# Altium PCB PressureSensor_Michał.Kapuściński.PcbDoc
Units mm, origin at the board's own origin, x right, y up, seen from the top; angles counter-clockwise.
Board outline 83.35 x 9.7 mm, 2 copper layers (Top Layer, Bottom Layer); 21 components, 19 nets, 106 pads, 37 vias.
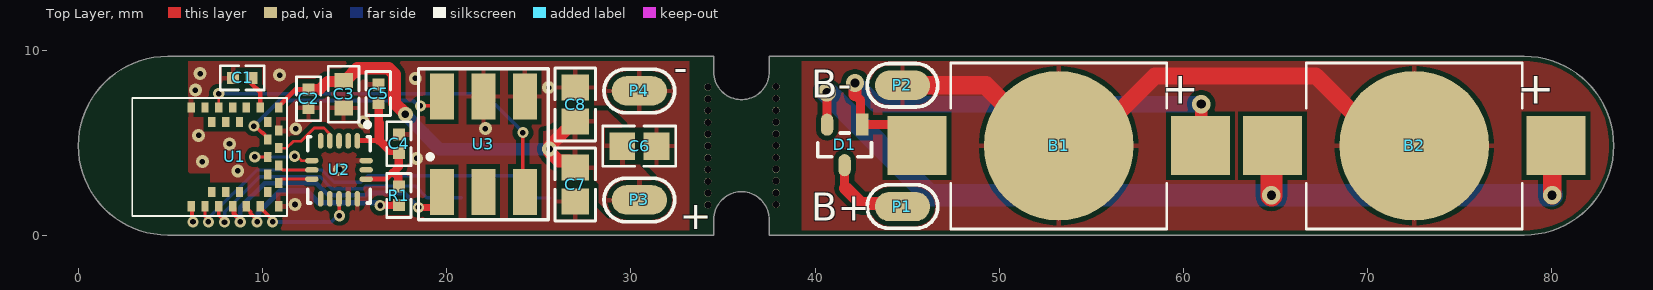
[diagram p0: Top Layer view]
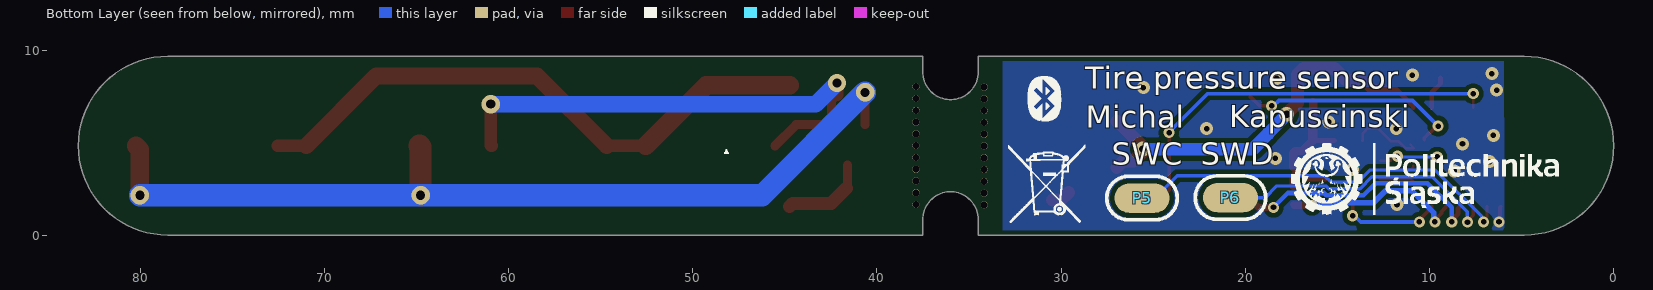
[diagram p1: Bottom Layer view, seen from below]
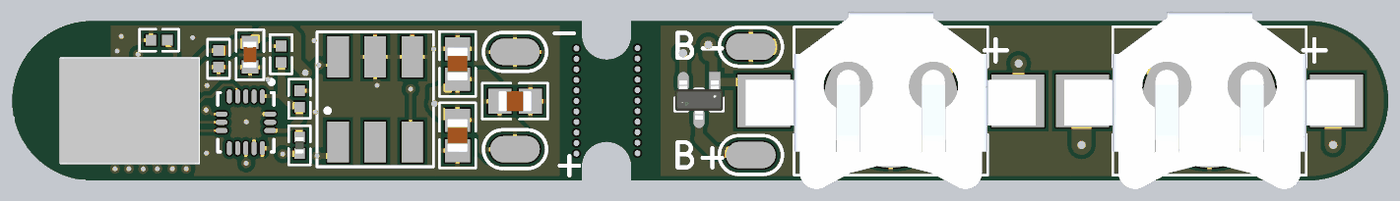
[diagram p2: 3D render of the assembled board from above, using the file's embedded part models]

## Layer stack, top to bottom
Top Solder: solder mask 0.0102, Solder Resist, Dk 3.5
Top Layer: signal copper 0.0356
Dielectric 1: dielectric 0.32, FR-4, Dk 4.8
Bottom Layer: signal copper 0.0356
Bottom Solder: solder mask 0.0102, Solder Resist, Dk 3.5

## Board outline
4.85,0 cw(c4.85,4.85) 4.85,9.7 34.5,9.7 34.5,8.85 ccw(c36,8.85) 37.5,8.85 37.5,9.7 78.5,9.7 cw(c78.5,4.85) 78.5,0 37.5,0 37.5,0.85 ccw(c36,0.85) 34.5,0.85 34.5,0

## Design rules (kind name [scope] priority, off if disabled: settings)
BoardOutlineClearance [All] p1: gap=0.254 ignorepadtopadclearanceinfootprint=FALSE except(0: Arc-SplitContinuation Track-SplitContinuation SMDPad-SplitContinuation THPad-SplitContinuation Via-SplitContinuation Fill-SplitContinuation Poly-SplitContinuation Region-SplitContinuation Text-SplitContinuation)
Clearance [All] p1: gap=0.254 ignorepadtopadclearanceinfootprint=FALSE except(0: THPad-Hole Via-Hole Fill-Hole Poly-Hole Region-Hole Text-Hole; 0.127: Arc-Arc Arc-Track Track-Track SMDPad-SMDPad; 0.203: Arc-SMDPad Arc-THPad Track-SMDPad Track-THPad Via-Via; 0.33: Arc-Hole Track-Hole SMDPad-Hole)
HoleSize [All] p1: absolutevalues=TRUE maxlimit=2.54 minlimit=0.3 maxpercent=80.000 minpercent=20.000
HoleToHoleClearance [All] p1: gap=0.5 allowstackedmicrovias=TRUE
MinimumSolderMaskSliver [All] p1: minsoldermaskwidth=0.145
PolygonConnect [All] p1: thpad.connectstyle=Relief thpad.reliefconductorwidth=0.5 thpad.reliefentries=4 thpad.polygonreliefangle="45 Angle" thpad.airgapwidth=0.254 smdpad.connectstyle=Relief smdpad.reliefconductorwidth=0.254 smdpad.reliefentries=4 smdpad.polygonreliefangle="90 Angle" smdpad.airgapwidth=0.254 via.connectstyle=Direct via.reliefconductorwidth=0.254 via.reliefentries=4 via.polygonreliefangle="90 Angle" via.airgapwidth=0.254
RoomDefinition Sheet1 [InComponentClass('Sheet1')] p1: confinementstyle=ConfineIn formatcopy=TRUE lockcomponents=FALSE outline 0,-1 0,10.7 85,10.7 85,-1
RoutingVias [All] p1: holewidth=0.3 width=0.6 viastyle="Through Hole" minholewidth=0.3 minwidth=0.6 maxholewidth=0.711 maxwidth=1.27
SilkToSolderMaskClearance [IsPad] p1: minsilkscreentomaskgap=0.15 clearancetoexposedcopper=TRUE
SolderMaskExpansion SolderMaskExpansion_Via [IsVia] p1: expansion=0.102 istentingtop=TRUE
SolderMaskExpansion [All] p2: expansion=0.102 istentingtop=FALSE
UnRoutedNet [All] p1: checkbadconnections=TRUE
Width [All] p1: maxlimit=3 minlimit=0.127 preferedwidth=0.254
25 further rules are at their usual default settings.

## Components (designator, comment, footprint, x,y, rotation, side; value= is the part's Value field where it differs from the comment)
B1 "BK-870" BK-870_footprint 53.222,4.85 r180 top locked
B2 "BK-870" BK-870_footprint 72.526,4.85 r180 top locked
C1 "1uF" "!!!! MOJ capacitor !!!!-Footprint-1" 8.898,8.534 r0 top locked
C2 "100nF" "!!!! MOJ capacitor !!!!-Footprint-1" 12.497,7.399 r90 top locked
C3 "4.7uF" "New footprint 1" 14.402,7.645 r90 top locked
C4 "100nF" "!!!! MOJ capacitor !!!!-Footprint-1" 17.399,4.961 r270 top locked
C5 "100nF" "!!!! MOJ capacitor !!!!-Footprint-1" 16.281,7.679 r270 top locked
C6 "10uF 10V" "!!! moj cap 0805 IPC_A" 30.455,4.826 r180 top locked
C7 "10uF 10V" "!!! moj cap 0805 IPC_A" 26.975,2.743 r90 top locked
C8 "10V 10uF" "!!! moj cap 0805 IPC_A" 26.975,7.087 r270 top locked
D1 "BAT54C" FP-MA03D-IPC_B 41.6,4.894 r270 top locked value=10pF
P1 "BAT+" "SMD wire pad-Footprint-1" 44.74,1.549 r0 top locked
P2 "BAT-" "SMD wire pad-Footprint-1" 44.74,8.128 r0 top locked
P3 "BAT+" "SMD wire pad-Footprint-1" 30.455,1.905 r0 top locked
P4 "BAT-" "SMD wire pad-Footprint-1" 30.455,7.823 r0 top locked
P5 "SWC" "SMD wire pad-Footprint-1" 25.603,2.007 r180 bottom
P6 "SWD" "SMD wire pad-Footprint-1" 20.803,2.032 r180 bottom
R1 "100R" "!!!! Moj Resistor !!!!-Footprint-2" 17.399,2.142 r90 top locked
U1 "MDBT42V" MDBT42V 2.921,4.242 r90 top locked
U2 "ADXL362" ADI-CC-16-4_N 14.15,3.539 r270 top
U3 "MD-PS002" MD-PS002-Footprint-1 19.736,2.343 r0 top locked

## Footprints (in the part's own frame and the unit in brackets; to place one, negate y for a bottom-side part, rotate by r counter-clockwise, add the part's x,y. Pads: shape width x height; smd on the part's side, far side on the other; paste and mask are expansions set on the pad)
"!!! moj cap 0805 IPC_A" [mm]
  rect 1.406x1.508 smd: 1(-0.926,0) 2(0.926,0)
  silkscreen extent -1.98,-1.09 1.98,1.09, body extent -1,-0.63 1,0.63, height 0.94
"!!!! MOJ capacitor !!!!-Footprint-1" [mm]
  rect 0.65x0.65 smd: 1(-0.5,0) 2(0.5,0)
  silkscreen extent -1.19,-0.66 1.19,0.66, body extent -0.53,-0.27 0.53,0.28, height 0.4
"!!!! Moj Resistor !!!!-Footprint-2" [mm]
  rect 0.65x0.65 smd: 1(-0.5,0) 2(0.5,0)
  silkscreen extent -1.19,-0.66 1.19,0.66, body extent -0.5,-0.25 0.5,0.25, height 0.4
ADI-CC-16-4_N [mm] "QFN, 16-Leads, Body 3.25x3mm, Pitch 0.5mm, IPC Medium Density"
  oval 0.85x0.3 smd: 1(-1.575,1) 2(-1.575,0.5) 3(-1.575,0) 4(-1.575,-0.5) 5(-1.575,-1) 9(1.575,-1) 10(1.575,-0.5) 11(1.575,0) 12(1.575,0.5) 13(1.575,1)
  oval 0.3x0.725 smd: 6(-0.5,-1.475) 7(0,-1.475) 8(0.5,-1.475) 14(0.5,1.475) 15(0,1.475) 16(-0.5,1.475)
  silkscreen extent -2.57,-1.7 1.8,1.7, body extent -1.65,-1.55 1.65,1.55, height 1.14
BK-870_footprint [mm]
  rect 3.2x3.2 smd: 1(-7.695,0) 3(7.695,0)
  round 8.13 smd: 2(0,0)
  silkscreen extent -5.86,-4.5 5.86,4.52, body extent -8.79,-5.39 8.79,5.39, height 3.18
FP-MA03D-IPC_B [mm]
  rect 1.204x0.671 smd paste+0 mask+0: 1(-1.1,0.95)
  rrect100% 1.204x0.671 smd paste+0 mask+0: 2(-1.1,-0.95) 3(1.1,0)
  silkscreen extent -0.65,-1.46 0.65,1.46, body extent -1.95,-1.71 1.95,1.71, height 0.25
MD-PS002-Footprint-1 [mm]
  rect 1.3x2.5 smd: 1(0,0) 2(2.25,0) 3(4.5,0) 4(4.5,5.175) 5(2.25,5.175) 6(0,5.175)
  silkscreen extent -1.28,-1.51 5.78,6.69
MDBT42V [mm]
  rect 0.55x0.4 smd mask+0: 1(-2.675,-3.2) 2(-2.675,-3.95) 3(-1.9,-4.325) 4(-2.675,-4.7) 5(-1.9,-5.075) 6(-2.675,-5.45) 7(-1.9,-5.825) 8(-2.675,-6.2) 9(-2.675,-6.95) 10(-2.675,-7.95) 11(-1.9,-7.365) 12(-1.425,-7.95) 13(-0.95,-7.365) 14(-0.475,-7.95) 15(0,-7.365) 16(0.475,-7.95) 17(0.95,-7.365) 18(1.425,-7.95) 19(1.9,-7.365) 20(2.675,-7.95) 21(2.675,-6.95) 22(2.675,-6.2) 23(1.9,-5.825) 24(2.675,-5.45) 25(1.9,-5.075) 26(2.675,-4.7) 27(1.9,-4.325) 28(2.675,-3.95) 29(2.675,-3.2)
  silkscreen extent -3.2,-8.4 3.2,0, body extent -3.2,-8.37 3.2,0.02, height 1.5
"New footprint 1" [mm]
  rect 0.8x1 smd: 1(-0.75,0) 2(0.75,0)
  silkscreen extent -1.52,-0.84 1.52,0.84, body extent -0.8,-0.41 0.8,0.41, height 0.9
"SMD wire pad-Footprint-1" [mm]
  oval 3x1.6 smd: 1(0,0)
  silkscreen extent -1.92,-1.18 1.92,1.18

## Part data
B1 B2: library part CMP-018-000000-3, "Battery Retainer Coin, 10.0mm 1 Cell SMD _SMT_ Tab", Package="DFN-8 MPD", Availability=Unavailable, Component Type=Standard, Design Item ID=BK-870, MF="MPD _Memory", MP=BK-870, Pin Count=3, Price=None, SnapEDA_Link=https://www.snapeda.com/parts/BK-870/MPD%20_Memory%20Protection%20Devices_/view-part/554643/?ref=snap, Source=SnapEDAsch.SchLib
C1 C2 C3 C4 C5 C6 C7 C8: library part CMP-001-0000-6, "0402 + 0603"
D1: library part CMP-07162-000010-1, "DIODE ARRAY SCHOTTKY 30V SOT23-3", Capacitance=10pF, Forward Current=200mA, Manufacturer="ON Semiconductor", Max Junction Temp=+150°C, Max Repetitive Reverse Voltage=30V, Max Surge Forward Current=600mA, Package=MA03D, Peak Reverse Current=2uA, Temperature="-55°C to +150°C", Temperature Range Low=-55°C, Automotive=No, Category=Diode, ComponentLink2Description=Datasheet, ComponentLink2URL=https://media.digikey.com/pdf/Data%20Sheets/ON%20Semiconductor%20PDFs/BAT54(A,C,S).pdf, Device Class L1="Discrete Semiconductors", Device Class L2=Diodes, Device Class L3="Schottky Diodes", Digikey Description="DIODE ARRAY SCHOTTKY 30V SOT23-3", Height=1.2mm, Manufacturer Part Number=BAT54C, Obsolete Part=true, Octopart=https://octopart.com/bat54c-on+semiconductor-8095621, Reverse Voltage=30V, Standoff Height=0mm, Temperature Range High=+150°C
P1 P2 P3 P4 P5 P6: library part CMP-00000-2, "SMD wire pad"
R1: library part CMP-009-00178-10, "0603 + 0402"
U1: library part CMP-009-000000-2, Design Item ID=MDBT42V, Source=MDBT42V_SCHLIB_210701.SchLib
U2: library part CMP-012-000000-1, "Micropower, 3-Axis, +/-2 g / +/-4 g / +/-8 g Digital Output MEMS Accelerometer with 200 Hz BW, Industrial, 16-pin LGA, Reel", Manufacturer="Analog Devices", PartNumber=ADXL362BCCZ-R2, Supply Current="1.8 uA", Voltage Supply (V)="1.6 to 3.5", # of Axes=3, -3dB Bandwidth="200 Hz", ComponentLink1Description="Manufacturer URL", ComponentLink1URL=http://www.analog.com/en/index.html, ComponentLink2Description=Datasheet, ComponentLink2URL=http://www.analog.com/static/imported-files/data_sheets/ADXL362.pdf, ComponentLink3Description="Package Specification", ComponentLink3URL=http:/www.analog.com/static/imported-files/packages/PKG_PDF/LGA(CC)/CC_16_4.pdf, ComponentLink4Description="Product URL", ComponentLink4URL=http://www.analog.com/en/mems-sensors/mems-inertial-sensors/adxl362/products/product.html, DatasheetVersion="Rev. B", Design Item ID=CMP-0885-00039-1, Mounting Technology="Surface Mount", Output Type=Digital, PackageDescription="16-Pin Land Grid Array, 3.25 x 3 mm Body, 0.5 mm Pitch", PackageReference=CC-16-4, PackageVersion="10-23-2012-A, 10/2012", Packing=Reel, Sensitivity="1/2/4 mg/LSB", Source=adxl362.SchLib
U3: library part CMP-010-00024-2, "Pressure sensor"

## Free pads (board coordinates)
  round 0.38 hole 0.38 unplated: 2(34.175,1.635) 2(34.175,2.275) 2(34.175,2.915) 2(34.175,3.555) 2(34.175,4.195) 2(34.175,4.835) 2(34.175,5.475) 2(34.175,6.115) 2(34.175,6.755) 2(34.175,7.395) 2(34.175,8.035) 2(37.875,1.655) 2(37.875,2.295) 2(37.875,2.935) 2(37.875,3.575) 2(37.875,4.215) 2(37.875,4.855) 2(37.875,5.495) 2(37.875,6.135) 2(37.875,6.775) 2(37.875,7.415) 2(37.875,8.055)

## Via types
v1: diameter 0.6, hole 0.3, Top Layer to Bottom Layer, tented both sides, 15 vias
v2: diameter 0.7, hole 0.3, Top Layer to Bottom Layer, tented both sides, 15 vias
v3: diameter 1, hole 0.5, Top Layer to Bottom Layer, tented both sides, 5 vias
v4: diameter 0.8, hole 0.4, Top Layer to Bottom Layer, tented both sides, 2 vias

## Nets (pads, with @x,y where several pads share a name; then routed paths per layer and width w, separated by ;. In a path a pad name is that pad's centre, name@x,y a point inside that pad or via, vN(x,y) a via of type N, cw(c..) or ccw(c..) an arc to the next point about the centre after c; other vN are vias at no path point)
ADXL362-CS: U1.12 U2.8 | length 2.3
  Top Layer w0.13: U2.8@12.381,3.073 12.384,3.071 12.716,3.071 U2.8@12.719,3.073
  Top Layer w0.15: U1.12 10.871,2.892 11.018,3.039 U2.8
ADXL362-INT1: U1.9 U2.11 | length 5.6
  Top Layer w0.2: U1.9 9.871,1.492 10.464,0.898 10.464,0.788 v1(10.541,0.711) ; U2.11@14.148,1.702 14.161,1.688 14.161,1.06 v1(14.173,1.049)
  Bottom Layer w0.2: v1(10.541,0.711) 13.728,0.711 14.065,1.049 v1(14.173,1.049)
ADXL362-MISO: U1.14 U2.7 | length 1.9
  Top Layer w0.13: U1.14 10.871,3.692 U1.14@11.006,3.557 ; 11.081,3.557 11.099,3.539
  Top Layer w0.15: U1.14@11.006,3.557 11.081,3.557 ; 11.099,3.539 U2.7
ADXL362-MOSI: U1.15 U2.6 | length 3.9
  Top Layer w0.15: v1(9.576,4.242) U1.15 ; v1(11.742,4.279) 11.864,4.279 12.105,4.039 U2.6
  Bottom Layer w0.15: v1(9.576,4.242) 11.705,4.242 v1(11.742,4.279)
ADXL362-SCLK: U1.16 U2.4 | length 4
  Top Layer w0.127: U1.16 U1.16@11.007,4.906
  Top Layer w0.15: U1.16 11.29,4.717 11.668,5.095 12.084,5.095 12.806,5.817 13.327,5.817 13.621,5.523 13.621,5.142 U2.4
ADXL362-VCC: R1.1 U1.8 | length 10.1
  Top Layer w0.2: U1.8 9.121,1.492 9.343,1.269 9.343,1.179 9.703,0.819 v1(9.703,0.711)
  Top Layer w0.3: R1.1@17.382,1.659 R1.1
  Top Layer w0.4: v1(16.383,1.605) 16.401,1.623 17.346,1.623 R1.1@17.382,1.659
  Bottom Layer w0.3: v1(9.703,0.711) 9.76,0.769 9.76,1.2 10.973,2.413 12.37,2.413 13.03,1.753 16.154,1.753 16.302,1.605 v1(16.383,1.605)
BRIDGE-VCC: U1.6 U3.1 | length 14.5
  Top Layer w0.254: U1.6@8.364,1.539 8.444,1.459 8.444,1.149 8.788,0.805 v1(8.788,0.711)
  Top Layer w0.381: v1(18.466,1.499) 19.276,1.499 19.736,1.958 U3.1
  Bottom Layer w0.254: v1(8.788,0.711) 8.788,1.499 10.107,2.817 12.918,2.817 13.579,2.157 15.598,2.157 15.727,2.286 17.678,2.286 v1(18.466,1.499)
GND: C1.1 C2.1 C3.1 C4.1 C5.1 C6.1 C7.1 C8.1 P4.1 U1.1 U1.10 U1.18 U1.29 U2.12 U2.13 U2.16 U3.4 U3.5 | length 0.9
  Top Layer w0.15: U1.1 U1.1@6.172,1.516 ; v1@6.172,0.762 v1(6.223,0.711)
  Top Layer w0.2: v1@6.172,0.762 U1.1@6.172,1.516
  other v2: 11.76,1.659 8.653,3.488 14.181,3.564 6.731,3.988 18.364,4.166 8.204,4.953 6.528,5.41 11.803,5.774 22.098,5.78 15.469,6.147 6.35,7.874 25.527,8.001 18.288,8.509 10.922,8.687 6.604,8.763
NetB1_1: B1.1 B1.3 D1.1 | length 27.4
  Top Layer w0.5: 42.164,7.62 42.465,7.319 42.465,6.08 D1.1 44.383,5.994 B1.3
  Top Layer w0.7: 42.164,7.62 v3(42.164,8.255) ; B1.1 60.96,4.893 v3(60.96,7.112)
  Bottom Layer w0.9: v3(42.164,8.255) 43.307,7.112 v3(60.96,7.112)
NetB1_2: B1.2 B2.2 P2.1 | length 32.3
  Top Layer w0.7: B1.2@52.544,4.85 B1.2 B1.2@54.662,4.85 ; B2.2@70.969,4.85 B2.2
  Top Layer w0.9: B1.2@54.662,4.85 58.448,8.636 67.183,8.636 B2.2@70.969,4.85
  Top Layer w1: P2.1 49.266,8.128 B1.2@52.544,4.85
NetB2_1: B2.1 B2.3 D1.2 | length 48.9
  Top Layer w0.5: v3(40.64,7.747) 40.645,7.742 40.645,6 D1.2
  Top Layer w1: v3(80.01,2.159) 80.01,4.639 B2.1
  Top Layer w1.2: v3(64.77,2.159) 64.77,4.789 B2.3
  Bottom Layer w1.2: v3(40.64,7.747) 46.228,2.159 v3(64.77,2.159) v3(80.01,2.159)
NetC1_2: C1.2 U1.21 | length 1.8
  Top Layer w0.254: C1.2 9.398,8.222 9.871,7.749 U1.21
NetC4_2: C4.2 C5.2 R1.2 U2.1 U2.14 | length 8.4
  Top Layer w0.203: 16.662,3.039 16.67,3.031
  Top Layer w0.254: U2.1@15.144,5.136 16.339,5.136 ; U2.14 16.662,3.039 ; 16.307,6.116 16.339,6.083 ; 16.67,3.031 16.721,3.031 17.069,3.378
  Top Layer w0.381: 17.069,3.378 17.15,3.378 ; R1.2@17.374,2.667 R1.2
  Top Layer w0.45: 16.307,6.116 C5.2@16.307,7.222 ; 16.339,5.136 16.914,4.561 17.299,4.561 C4.2 17.399,3.708 17.069,3.378 ; 17.15,3.378 17.374,3.155 R1.2@17.374,2.667
  Top Layer w0.5: 16.339,5.136 16.339,6.083
NetD1_3: D1.3 P1.1 | length 4.8
  Top Layer w0.5: D1.3 41.6,2.596 41.656,2.54
  Top Layer w0.7: 41.656,2.54 42.474,1.722 44.567,1.722 P1.1
NetP5_1: P5.1 U1.2 | length 21.7
  Top Layer w0.18: U1.2 6.871,1.015 7.061,0.825 v1(7.061,0.711)
  Bottom Layer w0.18: v1(7.061,0.711) 7.142,0.792 7.142,0.995 9.677,3.531 13.233,3.531 13.894,2.87 15.342,2.87 15.697,3.226 23.684,3.226 24.903,2.007 P5.1
NetP6_1: P6.1 U1.4 | length 15.8
  Top Layer w0.18: U1.4 7.621,1.088 7.933,0.776 v1(7.933,0.699)
  Bottom Layer w0.18: v1(7.933,0.699) 7.949,0.715 7.949,1.269 9.841,3.161 13.12,3.161 13.767,2.515 15.469,2.515 15.622,2.667 18.288,2.667 18.923,2.032 P6.1
P02/AIN0: U1.26 U3.3 | length 21.4
  Top Layer w0.13: U1.26 v1(7.621,7.673)
  Top Layer w0.2: v1(24.13,5.563) 24.13,2.449 U3.3
  Bottom Layer w0.2: v1(7.621,7.673) 22.045,7.673 24.13,5.588 v1(24.13,5.563)
P04/AIN2: U1.17 U3.6 | length 12.2
  Top Layer w0.2: v1(9.532,5.918) 9.606,5.918 9.96,5.564 9.989,5.564 10.286,5.267 U1.17 ; v1(18.572,7.015) 19.232,7.015 U3.6
  Bottom Layer w0.2: v1(9.532,5.918) 10.921,7.307 18.171,7.307 18.463,7.015 v1(18.572,7.015)
VBAT: C2.2 C3.2 C6.2 C7.2 C8.2 P3.1 U1.20 | length 23.4
  Top Layer w0.254: U1.20 10.871,6.992 11.779,7.899 C2.2
  Top Layer w0.381: C3.2@14.338,8.331 C3.2
  Top Layer w0.6: C2.2 13.081,7.899 13.513,8.331 C3.2@14.338,8.331
  Top Layer w0.7: C3.2 14.452,8.445 14.552,8.445 15.163,9.057 16.836,9.057 17.16,8.733 17.16,7.175 17.755,6.58 v4(17.755,6.553) ; v4@25.578,4.72 25.597,4.701 25.597,4.502 26.077,4.022 26.622,4.022 C7.2 ; v4@25.578,4.815 26.924,6.16 C8.2 ; P3.1@29.582,2.321 29.998,1.905 P3.1
  Bottom Layer w0.7: v4(17.755,6.553) 17.755,6.526 18.764,5.517 18.764,5.493 19.598,4.659 25.563,4.659 v4(25.578,4.674)
pads on no net: U1.3 U1.5 U1.7 U1.11 U1.13 U1.19 U1.22 U1.23 U1.24 U1.25 U1.27 U1.28 U2.2 U2.3 U2.5 U2.9 U2.10 U2.15 U3.2

## Polygon pours and split planes (outlines as drawn)
GND on Top Layer "GND_L01_P001" (solid, pour order 1): 5.966,1.854 7.163,1.854 7.163,3.353 5.968,3.353 5.974,9.691 33.172,9.7 33.172,0 5.964,0
NetB1_2 on Top Layer "NETB1_2_L01_P003" (solid, pour order 3): 39.268,0 39.268,9.7 83.337,9.7 83.337,0
VBAT on Top Layer "VBAT_L01_P000" (solid, pour order 0): 28.25,2.75 28.25,1.75 29,1 31.5,1 31.5,1.25 32.25,2 30.5,3.75 30.5,5 28.75,6.75 26.5,6.75 26.5,6.5 25.75,5.75 25.25,5.639 25.25,4.366 26.616,3 28,3
GND on Bottom Layer "GND_L02_P002" (solid, pour order 2): 5.945,1.854 5.947,1.854 5.947,3.353 5.953,9.691 33.152,9.7 33.152,0 5.944,0

## Silkscreen, mask and mechanical layers (free items; w line width, h text height)
Top Overlay:
  text "-" at 32.334,8.357 h1.52
  text "B-" at 39.776,7.442 h1.52
  text "B+" at 39.776,0.787 h1.52
  text "+" at 32.639,0.305 h1.52
Bottom Overlay:
  drawing of 33 lines, arcs and shapes, not listed
  text "Tire pressure sensor" at 28.68,7.94 h1.2
  text "Kapuscinski" at 20.857,5.858 h1.2
  text "Michal" at 28.654,5.813 h1.2

## Text inside footprints (layer, text, board x,y; h text height)
B1: Top Overlay "+" at 60.842,8.609 h1.78 r180
B2: Top Overlay "+" at 80.146,8.609 h1.78 r180
U1: Mechanical 2 "as wide as possible" at 2.046,1.542 h0.4 r90; Mechanical 2 "No ground pad" at 4.321,1.717 h0.4 r90; Mechanical 3 "Toplayer no ground pad" at 7.696,2.092 h0.2 r90